# EAGLE board geiger_V1.4 (EAGLE 9.4.2)
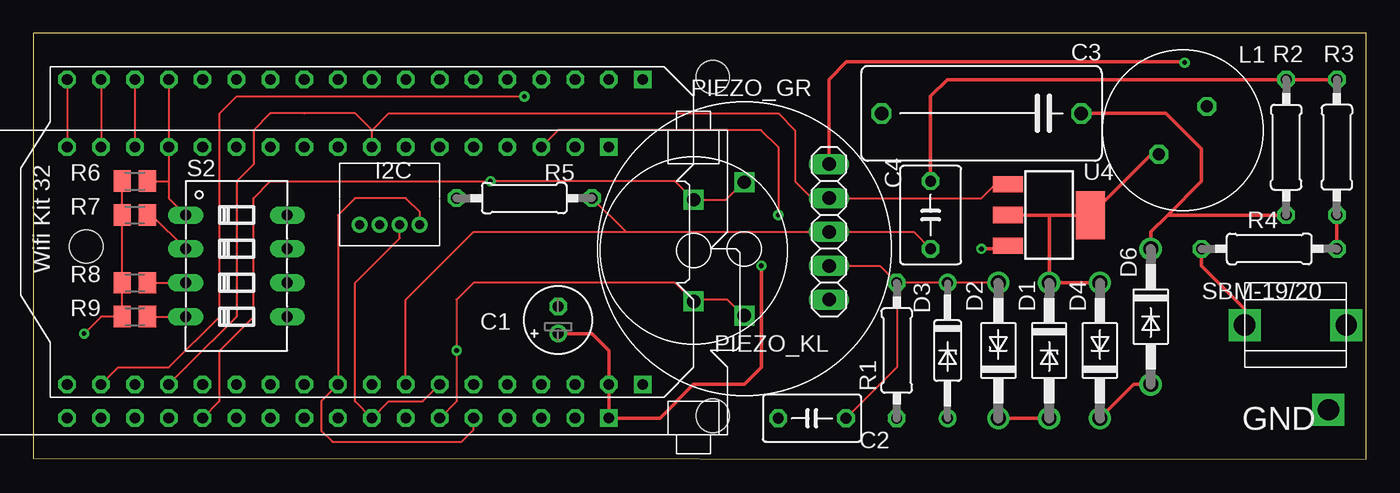
[diagram p0: board, top side]
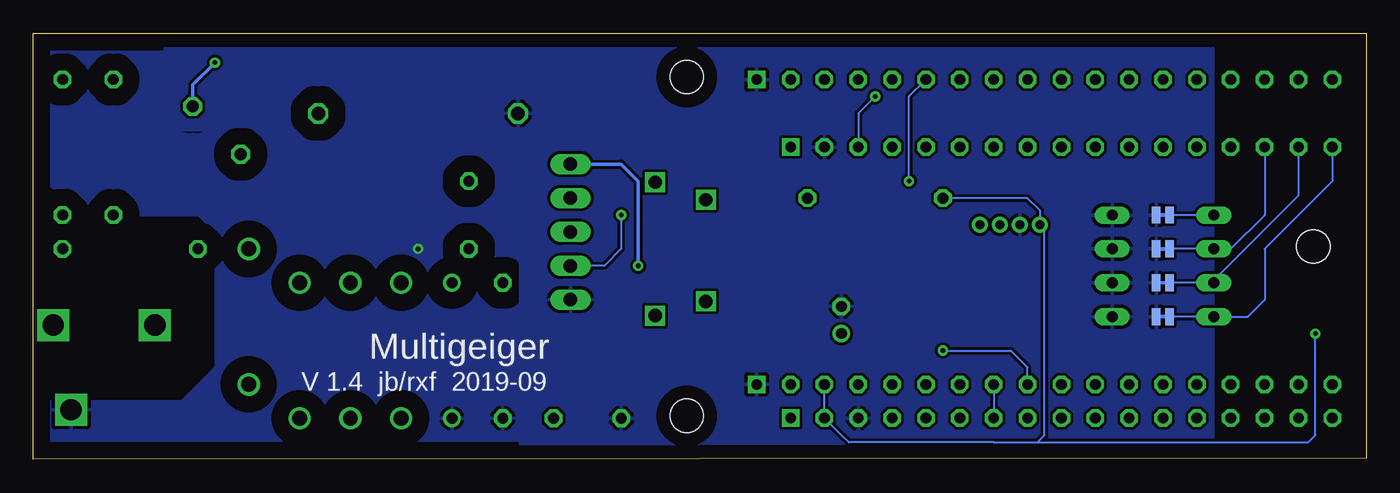
[diagram p1: board, bottom side, seen from below]

Size 99.98 x 31.94 mm. Coordinates in mm from the lower left corner, seen from the top.
Outline: 0,0.07 99.98,0 99.98,31.94 0,31.94 0,0.07
Copper layers (1*16): Top 0.035mm / dielectric 1.5mm / Bottom 0.035mm
Design rules "default": minimum track width 6mil, minimum drill 0.35mm, track to track 6mil, track to pad 6mil, pad to pad 6mil, via to via 6mil, smd to smd 6mil, copper to edge 40mil, drill to drill 6mil, minimum pad ring 10mil, minimum via ring 8mil, stop-mask expansion 4mil, vias tented up to drill 0mil, thermal gap 10mil
Net classes: 0 default: clearance 0.205 mm
Holes 2.5 mm at 3.97,15.96 50.96,28.66 50.96,3.26

## Footprints (pad centres in the part's own frame; a part is rotated, then mirrored left to right if it is on the bottom)
E2-5 = drill 0.813 pad 1.27: + -1.016,0 | drill 0.813 pad 1.27 octagon: - 1.016,0
C050-035X075 = drill 0.813 octagon: 1 -2.54,0; 2 2.54,0
C150-072X183 = drill 1.016 octagon: 1 -7.493,0; 2 7.493,0
C050-045X075 = drill 0.813 octagon: 1 -2.54,0; 2 2.54,0
DO41Z10 = drill 1.118: A 5.08,0; C -5.08,0
DO35Z10 = drill 0.813: A 5.08,0; C -5.08,0
DO41-10 = drill 1.118: A 5.08,0; C -5.08,0
S4B-ZR = drill 0.7: 1 6,2; 2 4.5,2; 3 3,2; 4 1.5,2
1X05 = drill 1.016 long: 1 -5.08,0; 2 -2.54,0; 3 0,0; 4 2.54,0; 5 5.08,0
SMT-JUMPER_2_NC_TRACE_NO-SILK = smd 0.635 x 1.27: 1 -0.508,0; 2 0.508,0
L-11P = drill 0.9 octagon: 1 -2.54,0; 2 2.54,0
PIEPSER_BIG = drill 1 square: P$1 -5,0; P$2 5,0
PIEPSER = drill 1 square: P$1 -3.81,0; P$2 3.81,0
0207/10 = drill 0.813 octagon: 1 -5.08,0; 2 5.08,0
M0805 = smd 1.3 x 1.6: 1 -0.95,0; 2 0.95,0
DIP04YL = drill 0.813 long: 1 -3.81,-3.81; 2 -1.27,-3.81; 3 1.27,-3.81; 4 3.81,-3.81; 5 3.81,3.81; 6 1.27,3.81; 7 -1.27,3.81; 8 -3.81,3.81
2.54MM_2X18_NOLORA_NOTEXT = drill 0.8 square: P$1 -20.32,-11.43; P$36 -20.32,11.43 | drill 0.8 octagon: P$2 -17.78,-11.43; P$3 -15.24,-11.43; P$4 -12.7,-11.43; P$5 -10.16,-11.43; P$6 -7.62,-11.43; P$7 -5.08,-11.43; P$8 -2.54,-11.43; P$9 0,-11.43; P$10 2.54,-11.43; P$11 5.08,-11.43; P$12 7.62,-11.43; P$13 10.16,-11.43; P$14 12.7,-11.43; P$15 15.24,-11.43; P$16 17.78,-11.43; P$17 20.32,-11.43; P$18 22.86,-11.43; P$19 22.86,11.43; P$20 20.32,11.43; P$21 17.78,11.43; P$22 15.24,11.43; P$23 12.7,11.43; P$24 10.16,11.43; P$25 7.62,11.43; P$26 5.08,11.43; P$27 2.54,11.43; P$28 0,11.43; P$29 -2.54,11.43; P$30 -5.08,11.43; P$31 -7.62,11.43; P$32 -10.16,11.43; P$33 -12.7,11.43; P$34 -15.24,11.43; P$35 -17.78,11.43
SOT223 = smd 1.219 x 2.235: 1 -2.311,-3.099; 2 0,-3.099; 3 2.311,-3.099 | smd 3.6 x 2.2: 4 0,3.099
FUSE_HOLDER = drill 1.6 square: P$1 -3.81,0.635; P$2 3.81,0.635
2.54MM_2X18_STICK_NO_TEXT = drill 0.8 square: P$1 -15.24,-11.43; P$34 -15.24,8.89 | drill 0.8 octagon: P$2 -12.7,-11.43; P$3 -10.16,-11.43; P$4 -7.62,-11.43; P$5 -5.08,-11.43; P$6 -2.54,-11.43; P$7 0,-11.43; P$8 2.54,-11.43; P$9 5.08,-11.43; P$10 7.62,-11.43; P$11 10.16,-11.43; P$12 12.7,-11.43; P$13 15.24,-11.43; P$14 17.78,-11.43; P$15 20.32,-11.43; P$16 22.86,-11.43; P$17 25.4,-11.43; P$18 25.4,8.89; P$19 22.86,8.89; P$20 20.32,8.89; P$21 17.78,8.89; P$22 15.24,8.89; P$23 12.7,8.89; P$24 10.16,8.89; P$25 7.62,8.89; P$26 5.08,8.89; P$27 2.54,8.89; P$28 0,8.89; P$29 -2.54,8.89; P$30 -5.08,8.89; P$31 -7.62,8.89; P$32 -10.16,8.89; P$33 -12.7,8.89
ONE_PAD = drill 1.6 square: X 0,0

## Placement (x,y rotation side)
C1  100µ  [E2-5]  39.37,10.44 90 top
C2  10n  [C050-035X075]  58.42,3.08 180 top
C3  100n  [C150-072X183]  71.12,25.94 180 top
C4  100p  [C050-045X075]  67.31,18.32 270 top
D1  ZY200  [DO41Z10]  76.2,8.16 270 top
D2  ZY200  [DO41Z10]  72.39,8.16 90 top
D3  BZX55  [DO35Z10]  68.58,8.16 270 top
D4  BYV26E (Glas)  [DO41-10]  80.01,8.16 90 top
D6  GP10Y  [DO41-10]  83.82,10.7 270 top
I2C  B4B-ZRSIDE_ENTRY  [S4B-ZR]  30.48,19.59 180 top
JP1  [1X05]  59.69,17.05 270 top
JP2  Jumper  [SMT-JUMPER_2_NC_TRACE_NO-SILK]  15.24,10.7 0 bottom
JP3  JUMPER-SMT_2_NC_TRACE_NO-SILK  [SMT-JUMPER_2_NC_TRACE_NO-SILK]  15.24,13.24 0 bottom
JP4  JUMPER-SMT_2_NC_TRACE_NO-SILK  [SMT-JUMPER_2_NC_TRACE_NO-SILK]  15.24,15.78 0 bottom
JP5  JUMPER-SMT_2_NC_TRACE_NO-SILK  [SMT-JUMPER_2_NC_TRACE_NO-SILK]  15.24,18.32 0 bottom
L1  L-11P  [L-11P]  86.23,24.67 225 top
PIEZO_GR  PIEPSER_BIG  [PIEPSER_BIG]  53.34,15.78 90 top
PIEZO_KL  PIEPSER  [PIEPSER]  49.53,15.65 90 top
R1  10k  [0207/10]  64.77,8.16 90 top
R2  1M  [0207/10]  93.98,23.4 270 top
R3  2M7  [0207/10]  97.79,23.4 90 top
R4  2M7  [0207/10]  92.71,15.78 0 top
R5  1M  [0207/10]  36.83,19.59 180 top
R6  10k  [M0805]  7.62,20.86 180 top
R7  10k  [M0805]  7.62,18.32 180 top
R8  10k  [M0805]  7.62,13.24 180 top
R9  10k  [M0805]  7.62,10.7 180 top
S2  [DIP04YL]  15.24,14.51 270 top
U2  WIFI-32NO_TEXT  [2.54MM_2X18_NOLORA_NOTEXT]  25.4,17.05 180 top
U4  BSP125  [SOT223]  76.2,18.32 270 top
U$1  FUSE_HOLDER  [FUSE_HOLDER]  94.68,9.43 0 top
U$3  WIFI-LORA-STICK-32  [2.54MM_2X18_STICK_NO_TEXT]  27.94,11.98 180 top
U$5  ONE_PAD  [ONE_PAD]  97.16,3.71 0 top

## Library data of the parts
C1-C4 = rcl; SPICEPREFIX: C
D1 D2 D4 D6 = diode
D3 L1 PIEZO_GR PIEZO_KL U4 U$1 U$5 = tlc5940
I2C = jst
JP1 = pinhead
JP2-JP5 = SparkFun-Jumpers
R1-R9 = rcl; SPICEPREFIX: R
S2 = switch-dil; OC_FARNELL: unknown; OC_NEWARK: unknown
U2 U$3 = ESP32_modules

## Nets
3V3: I2C.1 R5.2 R6.2 R7.2 R8.2 R9.2 U2.P$34 U$3.P$33
5V: C1.+ JP1.1 L1.1 U2.P$35 U$3.P$34
GMZ_COUNT: C4.2 JP1.3 R5.1 U2.P$29 U$3.P$28
GND: C1.- C2.2 C3.2 D3.A I2C.2 JP1.5 JP2.1 JP3.1 JP4.1 JP5.1 R1.1 S2.5 S2.6 S2.7 S2.8 U2.P$1 U2.P$36 U4.3 U$3.P$2 U$3.P$32 U$5.X
HV_CAP_FUL: C2.1 D2.A D3.C JP1.4 R1.2 U2.P$20 U$3.P$3
HV_FET_OUT: JP1.2 U2.P$22 U4.1 U$3.P$8
N$2: D1.A D2.C
N$3: D1.C D4.A L1.2 U4.2 U4.4
N$4: C3.1 D6.C R2.2
N$5: R4.1 U$1.P$1
N$6: R3.1 R4.2
N$7: C4.1 R2.1 R3.2
N$9: D4.C D6.A
N$13: PIEZO_GR.P$2 PIEZO_KL.P$2 U2.P$6 U$3.P$22
N$14: PIEZO_GR.P$1 PIEZO_KL.P$1 U2.P$28 U$3.P$29
SCL: I2C.3 U2.P$30 U$3.P$27
SDA: I2C.4 U2.P$27 U$3.P$30
SW0: JP5.2 R6.1 S2.1 U2.P$15 U$3.P$14
SW1: JP4.2 R7.1 S2.2 U2.P$16 U$3.P$15
SW2: JP3.2 R8.1 S2.3 U2.P$17 U$3.P$16
SW3: JP2.2 R9.1 S2.4 U2.P$18 U$3.P$17

## Tracks (layer width: path | path; a pad name or v marks a point on that pad's centre or on a via)
3V3  (via drill 0.35)
  Top 0.152: v3.81,9.43 5.08,10.7 R9.2 R8.2 R7.2 R6.2
  Bottom 0.152: 24.67,1.27 | 24.67,1.27 24.13,1.81 24.13,17.24 I2C.1 24.48,18.67 25.4,19.59 R5.2 | U2.P$34 U$3.P$33 39.36,1.82 38.82,1.27 27.94,1.27 24.67,1.27 | 24.67,1.27 4.35,1.27 3.81,1.81 v3.81,9.43
5V  (via drill 0.35)
  Top 0.152: 46.99,3.09 47.01,3.09
  Top 0.254: 46.99,3.09 U$3.P$34 U2.P$35 43.18,8.16 41.91,9.43 C1.+ | v54.61,14.51 54.61,6.89 53.34,5.62 49.53,5.62 47.01,3.09 | JP1.1 59.69,28.48 61.01,29.8 86.31,29.8 v86.36,29.75
  Bottom 0.254: JP1.1 55.88,22.13 54.61,20.86 v54.61,14.51 | L1.1 88.03,28.08 v86.36,29.75
GMZ_COUNT
  Top 0.152: C4.2 66.04,17.05 JP1.3 44.45,17.05 | 44.45,17.05 33.02,17.05 27.94,11.97 U2.P$29 | R5.1 44.45,17.05
  Bottom 0.152: U2.P$29 U$3.P$28
GND  (via drill 0.35)
  Top 0.254: U4.3 72.87,15.78 v71.12,15.78
  pour Bottom: 11.43,32.29 90.17,32.29 90.17,24.67 86.36,24.67 82.55,28.48 63.5,28.48 63.5,-0.73 11.43,-0.73
  pour Bottom (isolate 1.27): 62.23,-0.73 62.23,32.29 100.33,32.29 100.33,22.13 96.52,18.32 87.63,18.32 86.36,17.05 86.36,6.89 88.9,4.35 100.33,4.35 100.33,-0.73
HV_CAP_FUL  (via drill 0.35)
  Top 0.152: D2.A D3.C R1.2 | R1.2 64.77,6.89 C2.1 | JP1.4 63.5,14.51 R1.2 | U$3.P$3 39.37,24.68 54.59,24.68 55.88,23.4 v55.88,18.32 | U2.P$20 6.35,6.89 10.16,6.89 13.97,10.7 13.97,25.94 15.24,27.21 v36.83,27.21
  Bottom 0.152: v55.88,18.32 55.88,15.78 57.15,14.51 JP1.4 | v36.83,27.21 38.1,25.94 U$3.P$3
HV_FET_OUT
  Top 0.152: U4.1 72.87,20.86 72.39,20.86 71.12,19.59 JP1.2 58.42,19.59 57.15,20.86 57.15,24.67 55.88,25.94 26.65,25.94 25.4,24.68 | U$3.P$8 25.4,24.68 | 25.4,24.68 24.15,25.94 20.32,25.94 17.78,25.94 16.51,24.67 16.51,22.13 15.24,20.86 15.24,10.7 11.43,6.89 U2.P$22
N$2
  Top 0.254: D1.A D2.C
N$3
  Top 0.254: U4.2 74.93,18.32 76.2,18.32 | 76.2,18.32 U4.4 83.85,22.87 L1.2 | 76.2,18.32 D1.C D4.A
N$4
  Top 0.254: D6.C 83.82,17.05 85.09,18.32 | C3.1 84.96,25.94 87.63,23.27 87.63,20.86 85.09,18.32 | R2.2 85.09,18.32
N$5
  Top 0.254: R4.1 87.63,15.01 87.63,14.51 90.87,11.27 U$1.P$1
N$6
  Top 0.254: R3.1 R4.2
N$7
  Top 0.254: C4.1 67.31,27.21 68.58,28.48 82.93,28.48 R2.1 R3.2
N$9
  Top 0.254: D4.C 82.55,5.62 D6.A
N$13  (via drill 0.35)
  Top 0.152: PIEZO_GR.P$2 53.26,20.78 51.94,19.46 PIEZO_KL.P$2 48.13,20.86 v34.29,20.86 17.78,20.86 16.51,19.59 16.51,10.7 13.97,8.16 13.97,4.35 13.95,4.35 U$3.P$22
  Bottom 0.152: v34.29,20.86 34.29,27.21 U2.P$6
N$14  (via drill 0.35)
  Top 0.152: PIEZO_KL.P$1 49.4,11.97 | 49.4,11.97 48.13,13.24 33.02,13.24 31.75,11.97 v31.75,8.16 31.75,4.35 30.5,3.09 U$3.P$29 | PIEZO_GR.P$1 53.26,10.78 52.07,11.97 49.4,11.97
  Bottom 0.152: U2.P$28 25.4,6.89 26.67,8.16 v31.75,8.16
SCL
  Top 0.152: U2.P$30 29.21,4.35 26.65,4.35 U$3.P$27 25.38,3.09 24.13,4.35 24.13,13.24 27.48,16.59 I2C.3
SDA
  Top 0.152: U$3.P$30 33.02,2.21 32.12,1.3 22.44,1.3 21.59,2.15 21.59,4.35 U2.P$27 22.86,18.32 24.13,19.59 27.94,19.59 28.98,18.55 I2C.4
SW0
  Top 0.152: R6.1 10.16,20.86 | U2.P$15 U$3.P$14 10.16,20.86 | 10.16,20.86 10.16,19.59 S2.1
  Bottom 0.152: S2.1 JP5.2
SW1
  Top 0.152: R7.1 8.89,18.32 S2.2 | U2.P$16 U$3.P$15
  Bottom 0.152: U$3.P$15 7.62,18.32 10.16,15.78 S2.2 JP4.2
SW2
  Top 0.152: R8.1 S2.3 | U2.P$17 U$3.P$16
  Bottom 0.152: U$3.P$16 5.08,19.77 11.43,13.42 S2.3 JP3.2
SW3
  Top 0.152: R9.1 S2.4 | U2.P$18 U$3.P$17
  Bottom 0.152: U$3.P$17 2.54,20.86 7.62,15.78 7.62,11.97 8.89,10.7 S2.4 JP2.2

## Text on the board
tNames: SBM-19/20 | GND
bNames: Multigeiger | V 1.4 jb/rxf 2019-09